# Allegro board Mini_Audio.brd
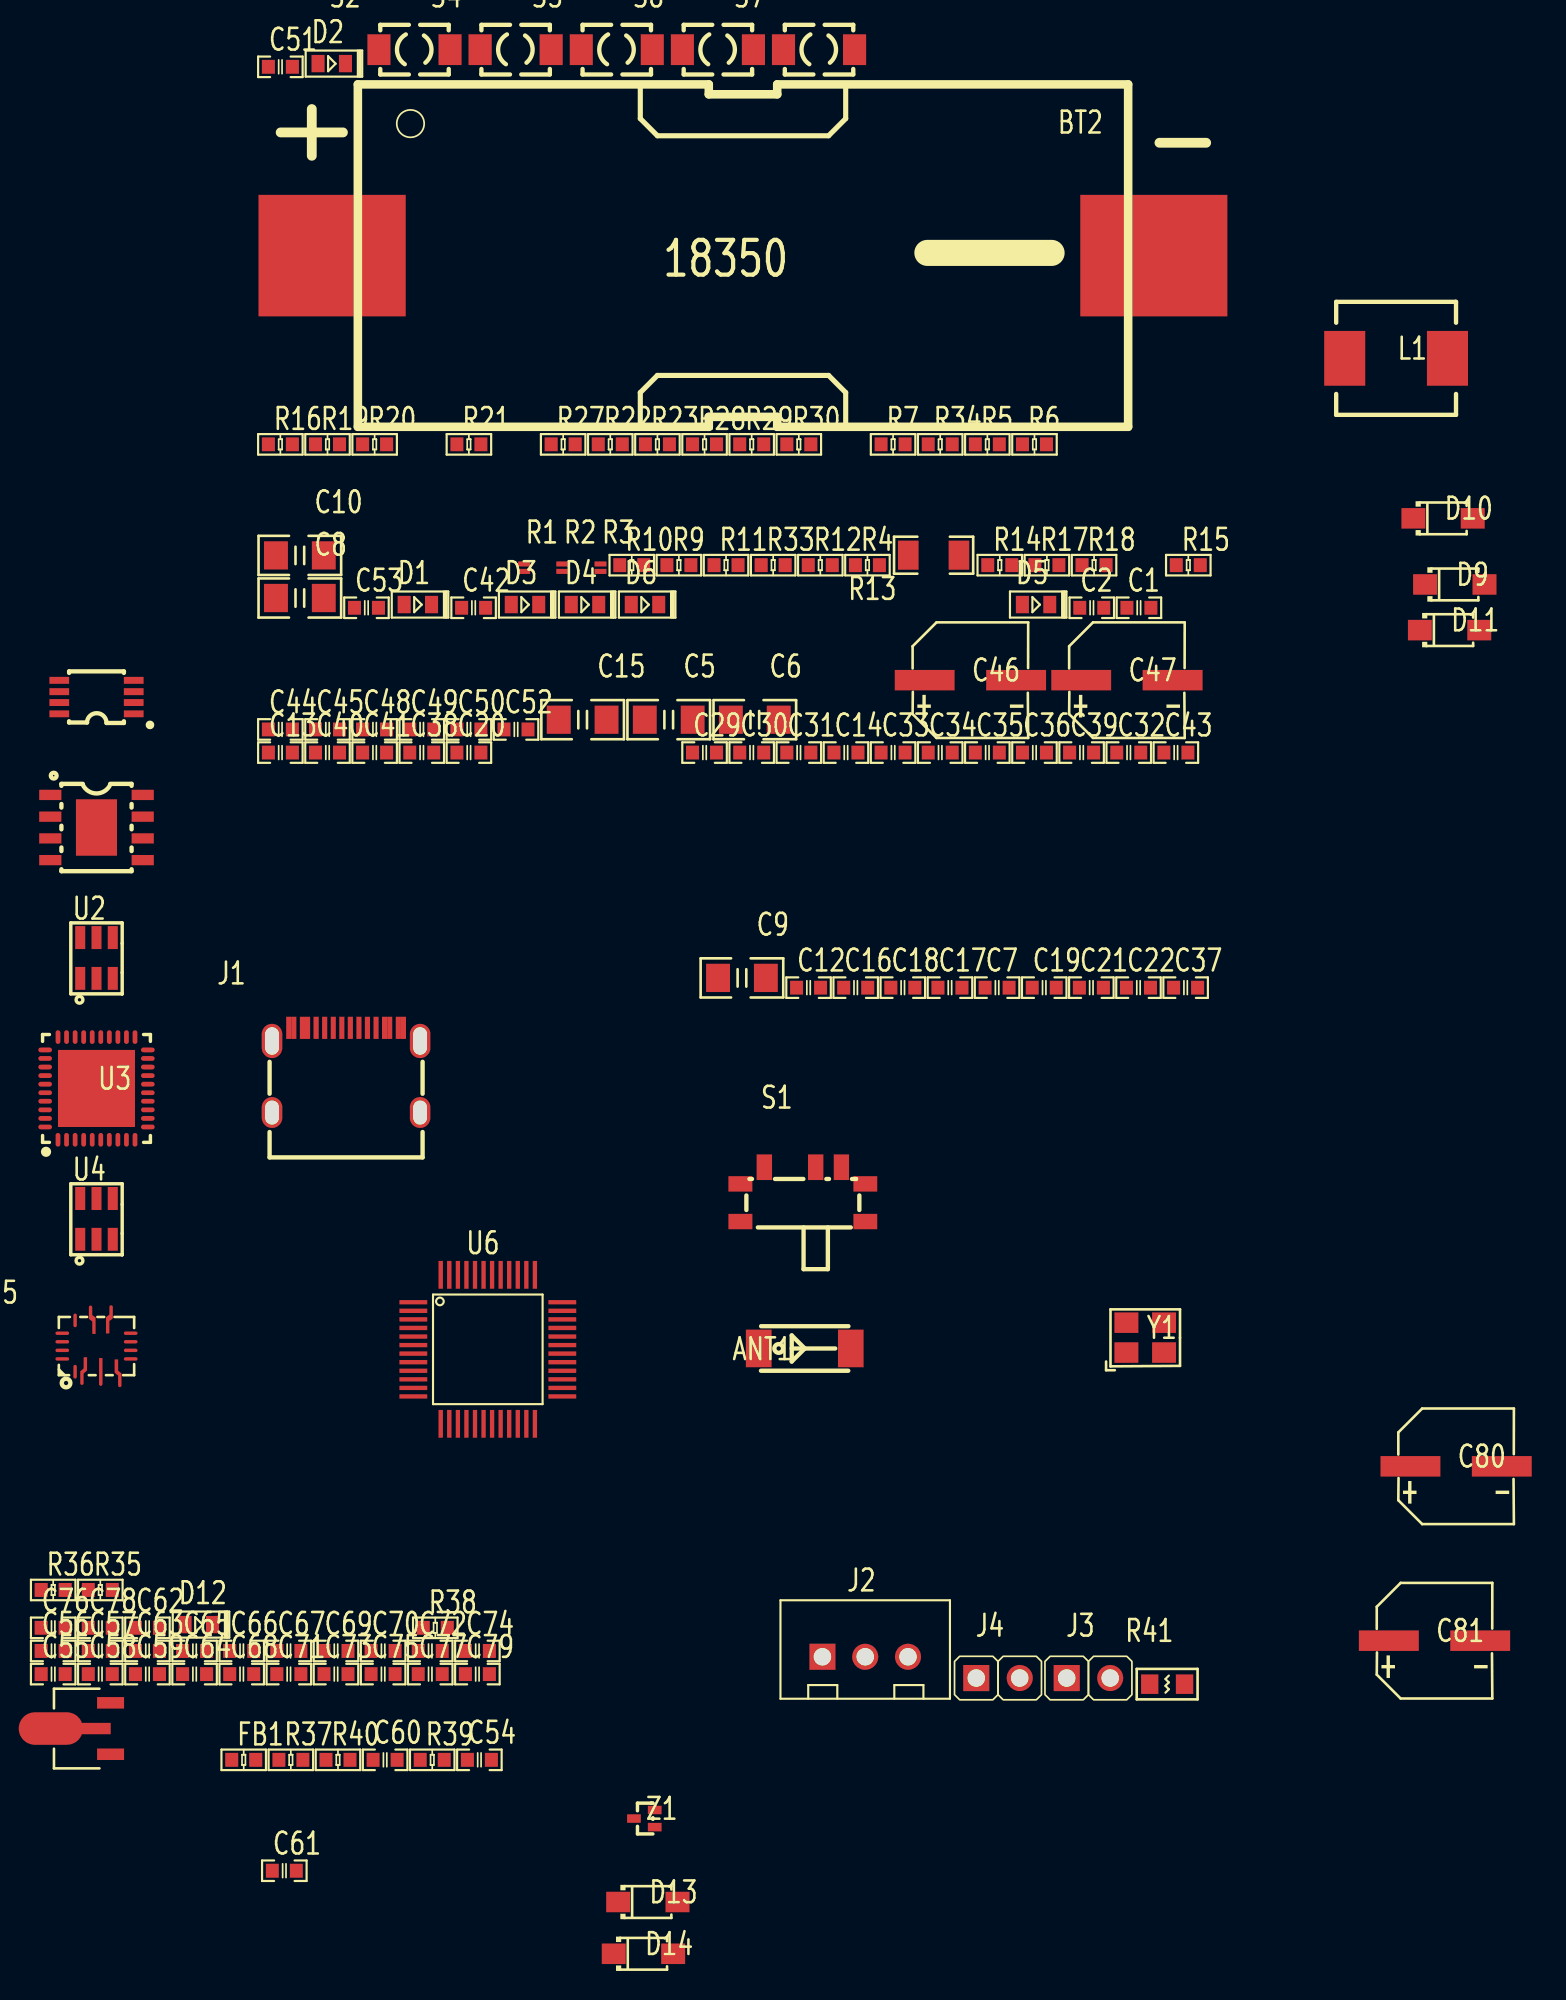
[diagram p0: board, top side]
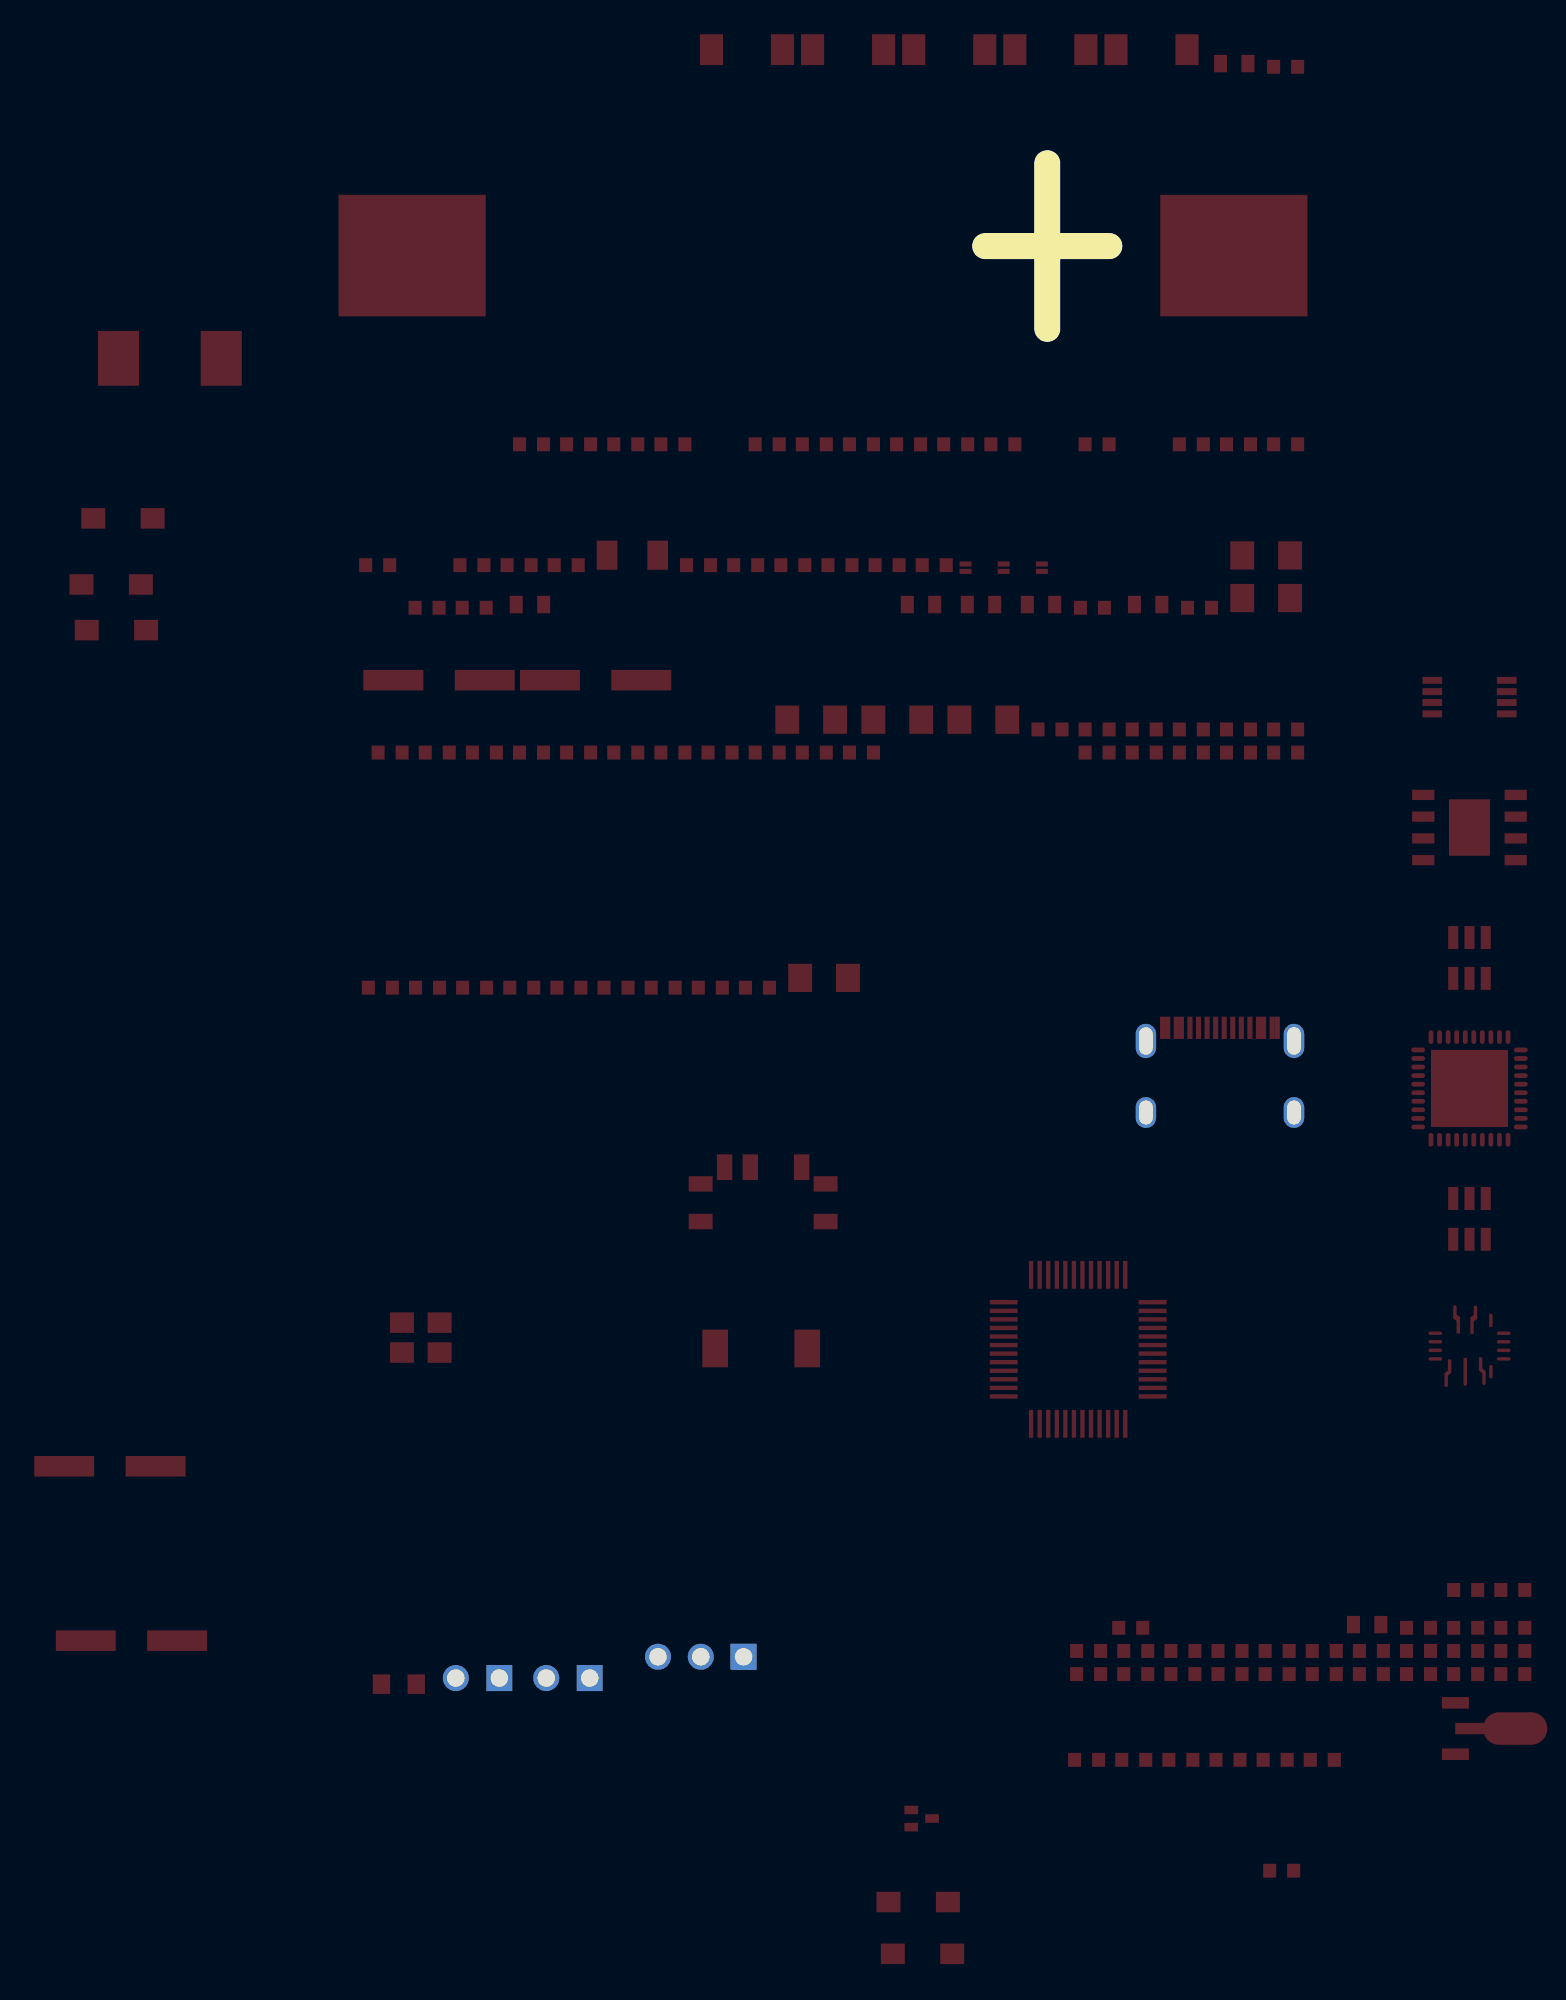
[diagram p1: board, bottom side, seen from below]

No outline. copper layers: TOP, BOTTOM. Coordinates in mm from the lowest, leftmost part position.

## Design rules (mm)
constraint set DEFAULT: min track width 0.127

## Placement (name value [footprint] x y rotation side)
ANT1  AN2051-245  [ANT-SMD-2X5_1]  43.91 35.36 0 top
BT2  -  [18350]  40.3 99.19 0 top
C1  0.1uF  [C0603]  63.43 78.62 0 top
C2  0.1uF  [C0603]  60.67 78.62 0 top
C5  22uF  [C1206]  35.96 72.09 0 top
C6  22uF  [C1206]  40.99 72.09 0 top
C7  0.1uF  [C0603]  55.14 56.43 0 top
C8  22uF  [C1206]  14.41 79.19 0 top
C9  22uF  [C1206]  40.24 57 0 top
C10  22uF  [C1206]  14.41 81.68 0 top
C12  0.1uF  [C0603]  44.13 56.43 0 top
C13  10uF  [C0603]  13.27 70.16 0 top
C14  1uF  [C0603]  46.31 70.16 0 top
C15  22uF  [C1206]  30.93 72.09 0 top
C16  0.1uF  [C0603]  46.88 56.43 0 top
C17  0.1uF  [C0603]  52.39 56.43 0 top
C18  0.1uF  [C0603]  49.63 56.43 0 top
C19  0.1uF  [C0603]  57.89 56.43 0 top
C20  1uF  [C0603]  24.28 70.16 0 top
C21  10uF  [C0603]  60.65 56.43 0 top
C22  10uF  [C0603]  63.4 56.43 0 top
C29  1uF  [C0603]  38.05 70.16 0 top
C30  1uF  [C0603]  40.81 70.16 0 top
C31  1uF  [C0603]  43.56 70.16 0 top
C32  1uF  [C0603]  62.83 70.16 0 top
C33  1uF  [C0603]  49.07 70.16 0 top
C34  1uF  [C0603]  51.82 70.16 0 top
C35  1uF  [C0603]  54.57 70.16 0 top
C36  1uF  [C0603]  57.33 70.16 0 top
C37  10uF  [C0603]  66.15 56.43 0 top
C38  10uF  [C0603]  21.53 70.16 0 top
C39  1uF  [C0603]  60.08 70.16 0 top
C40  10uF  [C0603]  16.02 70.16 0 top
C41  10uF  [C0603]  18.78 70.16 0 top
C42  1uF  [C0603]  24.56 78.62 0 top
C43  1uF  [C0603]  65.59 70.16 0 top
C44  1uF  [C0603]  13.27 71.52 0 top
C45  1uF  [C0603]  16.02 71.52 0 top
C46  100uF  [CAP_SMD-6_3X7_7]  53.58 74.39 0 top
C47  100uF  [CAP_SMD-6_3X7_7]  62.73 74.39 0 top
C48  1uF  [C0603]  18.78 71.52 0 top
C49  1uF  [C0603]  21.53 71.52 0 top
C50  1uF  [C0603]  24.28 71.52 0 top
C51  220pF  [C0603]  13.27 110.22 0 top
C52  1uF  [C0603]  27.04 71.52 0 top
C53  10pF  [C0603]  18.3 78.62 0 top
C54  0.1uF  [C0603]  24.9 11.33 0 top
C55  0.1uF  [C0603]  0 16.34 0 top
C56  10uF  [C0603]  0 17.69 0 top
C57  10uF  [C0603]  2.75 17.69 0 top
C58  0.1uF  [C0603]  2.75 16.34 0 top
C59  0.1uF  [C0603]  5.51 16.34 0 top
C60  12pF(NC)  [C0603]  19.39 11.33 0 top
C61  12pF(NC)  [C0603]  13.5 4.85 0 top
C62  1uF  [C0603]  5.51 19.04 0 top
C63  10uF  [C0603]  5.51 17.69 0 top
C64  0.1uF  [C0603]  8.26 16.34 0 top
C65  10uF  [C0603]  8.26 17.69 0 top
C66  10uF  [C0603]  11.01 17.69 0 top
C67  10uF  [C0603]  13.77 17.69 0 top
C68  0.1uF  [C0603]  11.01 16.34 0 top
C69  10uF  [C0603]  16.52 17.69 0 top
C70  10uF  [C0603]  19.27 17.69 0 top
C71  0.1uF  [C0603]  13.77 16.34 0 top
C72  10uF  [C0603]  22.03 17.69 0 top
C73  0.1uF  [C0603]  16.52 16.34 0 top
C74  10uF  [C0603]  24.78 17.69 0 top
C75  0.1uF  [C0603]  19.27 16.34 0 top
C76  10uF  [C0603]  0 19.04 0 top
C77  0.1uF  [C0603]  22.03 16.34 0 top
C78  10uF  [C0603]  2.75 19.04 0 top
C79  0.1uF  [C0603]  24.78 16.34 0 top
C80  100uF  [CAP_SMD-6_3X7_7]  81.96 28.47 0 top
C81  100uF  [CAP_SMD-6_3X7_7]  80.7 18.29 0 top
D1  Green  [LED0603]  21.3 78.81 0 top
D2  Green  [LED0603]  16.27 110.41 0 top
D3  Green  [LED0603]  27.56 78.81 0 top
D4  Green  [LED0603]  31.07 78.81 0 top
D5  RED  [LED0603]  57.42 78.81 0 top
D6  Green  [LED0603]  34.57 78.81 0 top
D9  DSK34  [SOD-123FL]  81.88 79.98 0 top
D10  DSK34  [SOD-123FL]  81.19 83.85 0 top
D11  DSK34  [SOD-123FL]  81.57 77.32 0 top
D12  Green  [LED0603]  8.51 19.23 0 top
D13  DSK34  [SOD-123FL]  34.74 3.02 0 top
D14  DSK34  [SOD-123FL]  34.48 0 0 top
FB1  600R  [R0603]  11.13 11.33 0 top
J1  Type-C 12P  [TYPE-C-12P]  17.11 51.61 0 top
J2  XH2.54 3P  [XH_254-3P]  47.44 17.35 0 top
J3  2.54 2P  [CON_254-2P]  60.48 14.84 0 top
J4  2.54 2P  [CON_254-2P]  55.19 14.84 0 top
L1  6.8uH  [IND-SMD_7X6_6MM]  78.45 93.19 0 top
Q1  SC8205A  [TSSOP-8]  2.53 73.41 0 top
R1  Short  [SHORT]  27.51 80.98 0 top
R2  Short  [SHORT]  29.74 80.98 0 top
R3  Short  [SHORT]  31.97 80.98 0 top
R4  100K  [R0603]  47.57 81.11 0 top
R5  200K  [R0603]  54.57 88.17 0 top
R6  270K  [R0603]  57.33 88.17 0 top
R7  22K  [R0603]  49.07 88.17 0 top
R9  2.2K  [R0603]  36.55 81.11 0 top
R10  2.2K  [R0603]  33.8 81.11 0 top
R11  10K  [R0603]  39.31 81.11 0 top
R12  100K  [R0603]  44.81 81.11 0 top
R13  10m  [R1206]  51.43 81.69 0 top
R14  1K  [R0603]  55.3 81.11 0 top
R15  100R  [R0603]  66.31 81.11 0 top
R16  330R  [R0603]  13.27 88.17 0 top
R17  1K  [R0603]  58.05 81.11 0 top
R18  1K  [R0603]  60.81 81.11 0 top
R19  0.4R  [R0603]  16.02 88.17 0 top
R20  3.3K  [R0603]  18.78 88.17 0 top
R21  0R  [R0603]  24.28 88.17 0 top
R22  NC  [R0603]  32.55 88.17 0 top
R23  103AT(NC)  [R0603]  35.3 88.17 0 top
R27  2.2K  [R0603]  29.79 88.17 0 top
R28  8.2K  [R0603]  38.05 88.17 0 top
R29  18K  [R0603]  40.81 88.17 0 top
R30  39K  [R0603]  43.56 88.17 0 top
R33  10K  [R0603]  42.06 81.11 0 top
R34  120K  [R0603]  51.82 88.17 0 top
R35  0R  [R0603]  2.75 21.25 0 top
R36  1K  [R0603]  0 21.25 0 top
R37  2.2k(NC)  [R0603]  13.88 11.33 0 top
R38  10K  [R0603]  22.32 19.04 0 top
R39  51K  [R0603]  22.14 11.33 0 top
R40  51K  [R0603]  16.64 11.33 0 top
R41  5R  [R0805]  65.07 15.75 0 top
S1  SK-3296S-01-L3  [SW_SMD_SK-3296S]  43.79 44.36 0 top
S2  KEY-SMD  [KEY_SMD]  21.11 111.22 0 top
S4  P/P  [KEY_SMD]  27.02 111.22 0 top
S5  PREV/VOL-  [KEY_SMD]  32.92 111.22 0 top
S6  NEXT/VOL+  [KEY_SMD]  38.83 111.22 0 top
S7  MODE  [KEY_SMD]  44.74 111.22 0 top
U1  TC4056A  [SOP-8-EN]  2.53 65.79 0 top
U2  DW01  [SOT23-6]  2.53 58.17 0 top
U3  PAM8610TR  [WQFN40-EP-6X6]  2.53 50.55 0 top
U4  HM1160  [SOT23-6]  2.53 42.93 0 top
U5  -  [JW3651]  2.53 35.31 0 top
U6  BP1048B2  [LQFP_48]  25.39 35.31 0 top
U7  HT7550S  [SOT-89-3]  2 13.16 0 top
Y1  24Mhz  [CRYSTAL_SMD3225-4P]  63.79 35.99 0 top
Z1  RCLAMP0502B  [SOT-523]  34.53 7.9 0 top

## Library data of the parts
ANT1 = ANT
BT2 = BATTERY
C1 C2 C5-C10 C12-C22 C29-C45 C48-C79 = C
C46 C47 C80 C81 = CE
D1-D6 D12 = LED
D9-D11 D13 D14 = DIODE SCHOTTKY
FB1 = FB
J1 = TYPE-C_12P_SMD
J2 = CON_3
J3 J4 = CON_2
L1 = L
Q1 = MOSFET-N_Dual
R1-R7 R9-R22 R27-R30 R33-R41 = R
R23 = NTC
S1 = SW_SMD_sk-3296s
S2 S4-S7 = KEY_D_OPEN
U1 = TC4056A
U2 = DW01
U3 = PAM8610TR
U4 = HM1160
U5 = JW3651
U6 = BP1048B2
U7 = HT7550
Y1 = CRYSTAL_F
Z1 = TVS_Dual

## Footprints (pads in the part's own frame, mm; a bottom-side part is the same pattern mirrored in y, then rotated)
18350
  rect 8.6x7.099 smd: 1(-24,0) 2(24,0)
ANT-SMD-2X5_1
  rect 1.501x2.2 smd: 1(-2.69,0) 2(2.69,0)
C0603
  rect 0.762x0.813 smd: 1(-0.701,0) 2(0.701,0)
C1206
  rect 1.397x1.651 smd: 1(-1.397,0) 2(1.397,0)
CAP_SMD-6_3X7_7
  rect 3.5x1.199 smd: 1(-2.67,0) 2(2.67,0)
CON_254-2P
  rect 1.524x1.524 hole 1.016: 1(-1.27,1.27)
  round 1.524 hole 1.016: 2(1.27,1.27)
CRYSTAL_SMD3225-4P
  rect 1.4x1.199 smd: 1(-1.1,-0.874) 2(1.1,-0.874) 3(1.1,0.874) 4(-1.1,0.874)
IND-SMD_7X6_6MM
  rect 2.4x3.2 smd: 1(-3,0) 2(3,0)
JW3651
  oval 0.201x0.8 smd: 1(-1.25,-1.308) 11(-1.25,1.692)
  custom 0.399x1.621 smd: 2(-0.749,-1.27)
  custom 0.201x1.621 smd: 3(0.251,-1.321)
  custom 0.401x1.621 smd: 4(1.262,-1.397)
  oval 0.8x0.201 smd: 5(1.999,-0.559) 6(1.999,-0.058) 7(1.999,0.442) 8(1.999,0.942) 12(-1.999,0.942) 13(-1.999,0.442) 14(-1.999,-0.058) 15(-1.999,-0.559)
  custom 0.399x1.648 smd: 9(0.752,1.753)
  custom 0.399x1.654 smd: 10(-0.249,1.727)
KEY_SMD
  rect 1.351x1.801 smd: 1(-2.075,0) 2(2.075,0)
LED0603
  rect 0.762x1.016 smd: 1(-0.8,0) 2(0.8,0)
LQFP_48
  rect 1.626x0.254 smd: 1(-4.351,2.751) 2(-4.351,2.25) 3(-4.351,1.75) 4(-4.351,1.25) 5(-4.351,0.749) 6(-4.351,0.249) 7(-4.351,-0.249) 8(-4.351,-0.749) 9(-4.351,-1.25) 10(-4.351,-1.75) 11(-4.351,-2.25) 12(-4.351,-2.751) 25(4.351,-2.751) 26(4.351,-2.25) 27(4.351,-1.75) 28(4.351,-1.25) 29(4.351,-0.749) 30(4.351,-0.249) 31(4.351,0.249) 32(4.351,0.749) 33(4.351,1.25) 34(4.351,1.75) 35(4.351,2.25) 36(4.351,2.751)
  rect 0.254x1.626 smd: 13(-2.751,-4.351) 14(-2.25,-4.351) 15(-1.75,-4.351) 16(-1.25,-4.351) 17(-0.749,-4.351) 18(-0.249,-4.351) 19(0.249,-4.351) 20(0.749,-4.351) 21(1.25,-4.351) 22(1.75,-4.351) 23(2.25,-4.351) 24(2.751,-4.351) 37(2.751,4.351) 38(2.25,4.351) 39(1.75,4.351) 40(1.25,4.351) 41(0.749,4.351) 42(0.249,4.351) 43(-0.249,4.351) 44(-0.749,4.351) 45(-1.25,4.351) 46(-1.75,4.351) 47(-2.25,4.351) 48(-2.751,4.351)
R0603
  rect 0.762x0.813 smd: 1(-0.701,0) 2(0.701,0)
R0805
  rect 1.016x1.143 smd: 1(-1.016,0) 2(1.016,0)
R1206
  rect 1.206x1.702 smd: 1(-1.478,0) 2(1.478,0)
SHORT
  rect 0.701x0.3 smd: 1(0,0.203) 2(0,-0.229)
SOD-123FL
  rect 1.4x1.199 smd: 1(1.735,0) 2(-1.735,0)
SOP-8-EN
  rect 1.3x0.599 smd: 1(-2.7,1.905) 2(-2.7,0.635) 3(-2.7,-0.635) 4(-2.7,-1.905) 5(2.7,-1.905) 6(2.7,-0.635) 7(2.7,0.635) 8(2.7,1.905)
  rect 2.4x3.299 smd: 9(0,0)
SOT23-6
  rect 0.589x1.341 smd: 1(-0.95,-1.191) 2(0,-1.191) 3(0.95,-1.191) 4(0.95,1.191) 5(0,1.191) 6(-0.95,1.191)
SOT-89-3
  rect 1.575x0.673 smd: 1(1.356,-1.501) 3(1.356,1.499)
  custom 5.375x1.9 smd: 2(-1.321,0)
SOT-523
  rect 0.8x0.5 smd: 1(0.607,-0.5) 2(0.607,0.5) 3(-0.607,0)
SW_SMD_SK-3296S
  rect 0.899x1.501 smd: 1(-2.25,1.587) 2(0.749,1.587) 3(2.25,1.587)
  rect 1.4x0.899 smd: 4(-3.65,-1.587) 5(3.65,-1.587) 6(-3.65,0.612) 7(3.65,0.612)
TSSOP-8
  rect 1.151x0.406 smd: 1(2.174,-0.978) 2(2.174,-0.318) 3(2.174,0.318) 4(2.174,0.978) 5(-2.174,0.978) 6(-2.174,0.318) 7(-2.174,-0.318) 8(-2.174,-0.978)
TYPE-C-12P
  rect 0.3x1.3 smd: A1(-3.35,2.474) A4(-2.55,2.474) A5(-1.25,2.474) A6(-0.249,2.474) A7(0.249,2.474) A8(1.25,2.474) A9(2.55,2.474) A12(3.35,2.474) B1(3.051,2.474) B4(2.25,2.474) B5(1.75,2.474) B6(0.749,2.474) B7(-0.749,2.474) B8(-1.75,2.474) B9(-2.25,2.474) B12(-3.051,2.474)
  oval 1.199x1.999 hole 0.8x1.6: G1(-4.326,1.707) G2(4.326,1.707)
  oval 1.199x1.801 hole 0.8x1.4: G3(-4.326,-2.474) G4(4.326,-2.474)
WQFN40-EP-6X6
  oval 0.279x0.8 smd: 1(-2.25,-3) 2(-1.75,-3) 3(-1.25,-3) 4(-0.749,-3) 5(-0.249,-3) 6(0.249,-3) 7(0.749,-3) 8(1.25,-3) 9(1.75,-3) 10(2.25,-3) 21(2.25,3) 22(1.75,3) 23(1.25,3) 24(0.749,3) 25(0.249,3) 26(-0.249,3) 27(-0.749,3) 28(-1.25,3) 29(-1.75,3) 30(-2.25,3)
  oval 0.8x0.279 smd: 11(3,-2.25) 12(3,-1.75) 13(3,-1.25) 14(3,-0.749) 15(3,-0.249) 16(3,0.249) 17(3,0.749) 18(3,1.25) 19(3,1.75) 20(3,2.25) 31(-3,2.25) 32(-3,1.75) 33(-3,1.25) 34(-3,0.749) 35(-3,0.249) 36(-3,-0.249) 37(-3,-0.749) 38(-3,-1.25) 39(-3,-1.75) 40(-3,-2.25)
  rect 4.501x4.501 smd: 41(0,0)
XH_254-3P
  rect 1.524x1.524 hole 1.016: 1(-2.499,0)
  round 1.524 hole 1.016: 2(0,0) 3(2.499,0)

## Nets
5V: C63.2 C64.2 C74.1 C75.1 U6.2 U7.3(VOUT)
AGND: C29.2 C31.2 C32.2 C36.2 C37.2 C38.2 C39.2 C40.2 C41.2 C44.2 C45.2 C46.2 C47.2 C48.1 C49.1 C50.1 C51.1 C52.1 C62.1 C70.1 C71.1 C76.2 C77.2 C78.1 C79.1 J2.3 R34.2 R35.2 U3.6 U3.7 U3.8 U3.11 U3.20 U3.24 U3.28 U3.31 U3.40 U3.41 U6.4 U6.45
GND: ANT1.2 C5.1 C6.1 C7.1 C15.1 C16.1 C17.1 C54.2 C55.2 C56.2 C57.2 C58.2 C59.2 C60.2 C61.2 C63.1 C64.1 C72.2 C73.2 C74.2 C75.2 C80.2 D12.2(CATHODE) R10.1 R13.2 R35.1 S4.1 S5.1 S6.1 S7.1 U6.12 U6.22 U7.1 Y1.3 Y1.4 Z1.3
PVCCL: C40.1 C41.1 C44.1 C45.1 C47.1 C76.1 C77.1 D10.2 U3.12 U3.19
PVCCR: C36.1 C37.1 C38.1 C39.1 C46.1 C78.2 C79.2 D9.2 U3.32 U3.39
VBAT: BT2.1 C22.2 D14.1 R15.1 S2.1 U1.5
VBUS: D13.1 J1.A4 J1.A9 J1.B4 J1.B9(VBUS4) R19.1
VCC: C5.2 C6.2 C7.2 C15.2 C16.2 C17.2 C80.1 D9.1 D10.1 D11.1 R1.2 R2.2 R3.2 R41.1 U5.4(VO)
VDD33: C55.1 C56.1 FB1.1 U6.10
VIN: C8.2 C9.2 C10.2 C12.2 C14.2 C18.2 C81.1 D13.2 D14.2 R11.2 U5.2
AUX_L: C66.1
AUX_R: C65.1
BGND: C8.1 C9.1 C10.1 C12.1 C13.1 C14.1 C18.1 C20.1 C21.1 C22.1 C81.2 J1.A1 J1.A12 J1.B1 J1.B12 J1.G1 J1.G2 J1.G3 J1.G4 Q1.6 Q1.7(S1_2) R7.2 R9.1 R12.1 R13.1 R14.2 R20.2 R21.2 R23.1 R39.2 R40.1 U1.3 U4.2 U5.3 U5.6 U5.12 U5.14
BT_RF: C53.2 U6.11
DAC_L: C33.2 C67.1
DAC_R: C30.2 C68.1
DAC_X: C69.1
KEY: C54.1 R27.2 R28.2 R29.2 R30.2 U6.5
LOUT+: C43.2 J4.1 U3.17 U3.18
LOUT-: C42.2 J4.2 U3.13 U3.14
MUTE: R37.1 R38.1 U3.25
POWER: C50.2 D11.2 R33.2 U3.26
ROUT+: C35.2 J3.1 U3.33 U3.34
ROUT-: C34.2 J3.2 U3.37 U3.38
USB_D+: J1.A6 J1.B6 U6.27 Z1.1
USB_D-: J1.A7 J1.B7 U6.26 Z1.2
N750395: C1.2 U5.8
N750403: C1.1 L1.1 U5.9
N750411: C2.2 L1.2 U5.10
N750419: C2.1 U5.11
N750759: R1.1 R4.2
N750763: R2.1 R5.2
N750767: R3.1 R6.2
N751001: R4.1 R5.1 R6.1 R7.1 U5.5
N751035: C13.2 U5.13
N751151: R12.2 S1.2 U5.7
N751251: R10.2 U5.1
N751255: R9.2 U5.15
N751437: R11.1 S1.3
N752381: Q1.4 U2.3
N752393: Q1.5 U2.1
N752405: Q1.1 Q1.8
N752409: BT2.2 C19.1 Q1.2 Q1.3 U2.6(VSS)
N752461: R14.1 U2.2
N752730: C19.2 R15.2 U2.5
N756100: D1.2(CATHODE) U4.3
N756203: D2.2(CATHODE) U4.4
N756210: D3.2(CATHODE) U4.5
N756217: D4.2(CATHODE) U4.6
N756308: D1.1 D2.1 D3.1 D4.1 R16.1
N756413: C20.2 R16.2 S2.2 U4.1(VDD)
N758124: C21.2 D5.1 D6.1 R19.2 R22.1 U1.4(VCC) U1.8
N758277: R17.2 U1.7
N758281: R18.2 U1.6
N759736: R20.1 U1.2
N760202: R21.1 R22.2 R23.2 U1.1
N770386: R27.1 S4.2
N770424: R28.1 S5.2
N770462: R29.1 S6.2
N770500: R30.1 S7.2
N773268: C29.1 U3.1
N774002: C30.1 U3.2
N774087: C31.1 J2.1 U3.3 U3.4(VREF)
N775087: J2.2 U3.5
N778232: C32.1 U3.10
N778264: C33.1 U3.9
N780483: C34.1 U3.36
N780544: C35.1 U3.35
N782637: C42.1 U3.15
N782641: C43.1 U3.16
N787715: R33.1 U3.29
N789518: C48.2 U3.30
N790218: C49.2 U3.27
N795863: R34.1 U3.23
N795893: C51.2 U3.22
N796121: C52.2 U3.21
N802020: ANT1.1 C53.1
N817418: C59.1 U6.14
N817422: C57.1 C58.1 FB1.2 U6.13
N818543: C60.1 U6.15 Y1.1
N818547: C61.1 U6.16 Y1.2
N820780: C62.2 U6.3
N824036: D12.1 R36.1
N824040: R36.2 U6.23
N824551: C66.2 U6.41
N824563: C65.2 U6.40
N824834: R37.2 U6.35
N825044: R38.2 U6.37
N825454: C69.2 U6.48
N825458: C67.2 U6.47
N825462: C68.2 U6.46
N825584: C70.2 C71.2 U6.44(VMID)
N834858: C72.1 C73.1 R41.2 U7.2
N839238: J1.A5 R39.1
N839242: J1.B5 R40.2
N7575341: D5.2(CATHODE) R17.1
N7575661: D6.2(CATHODE) R18.1

Pads without a net: J1 A8 B8; S1 1 4 5 6 7; U1 9; U2 4; U6 1 6 7 8 9 17 18 19 20 21 24 25 28 29 30 31 32 33 34 36 38 39 42 43
